# EAGLE board driver_piezo2_pan (EAGLE 7.1.0)
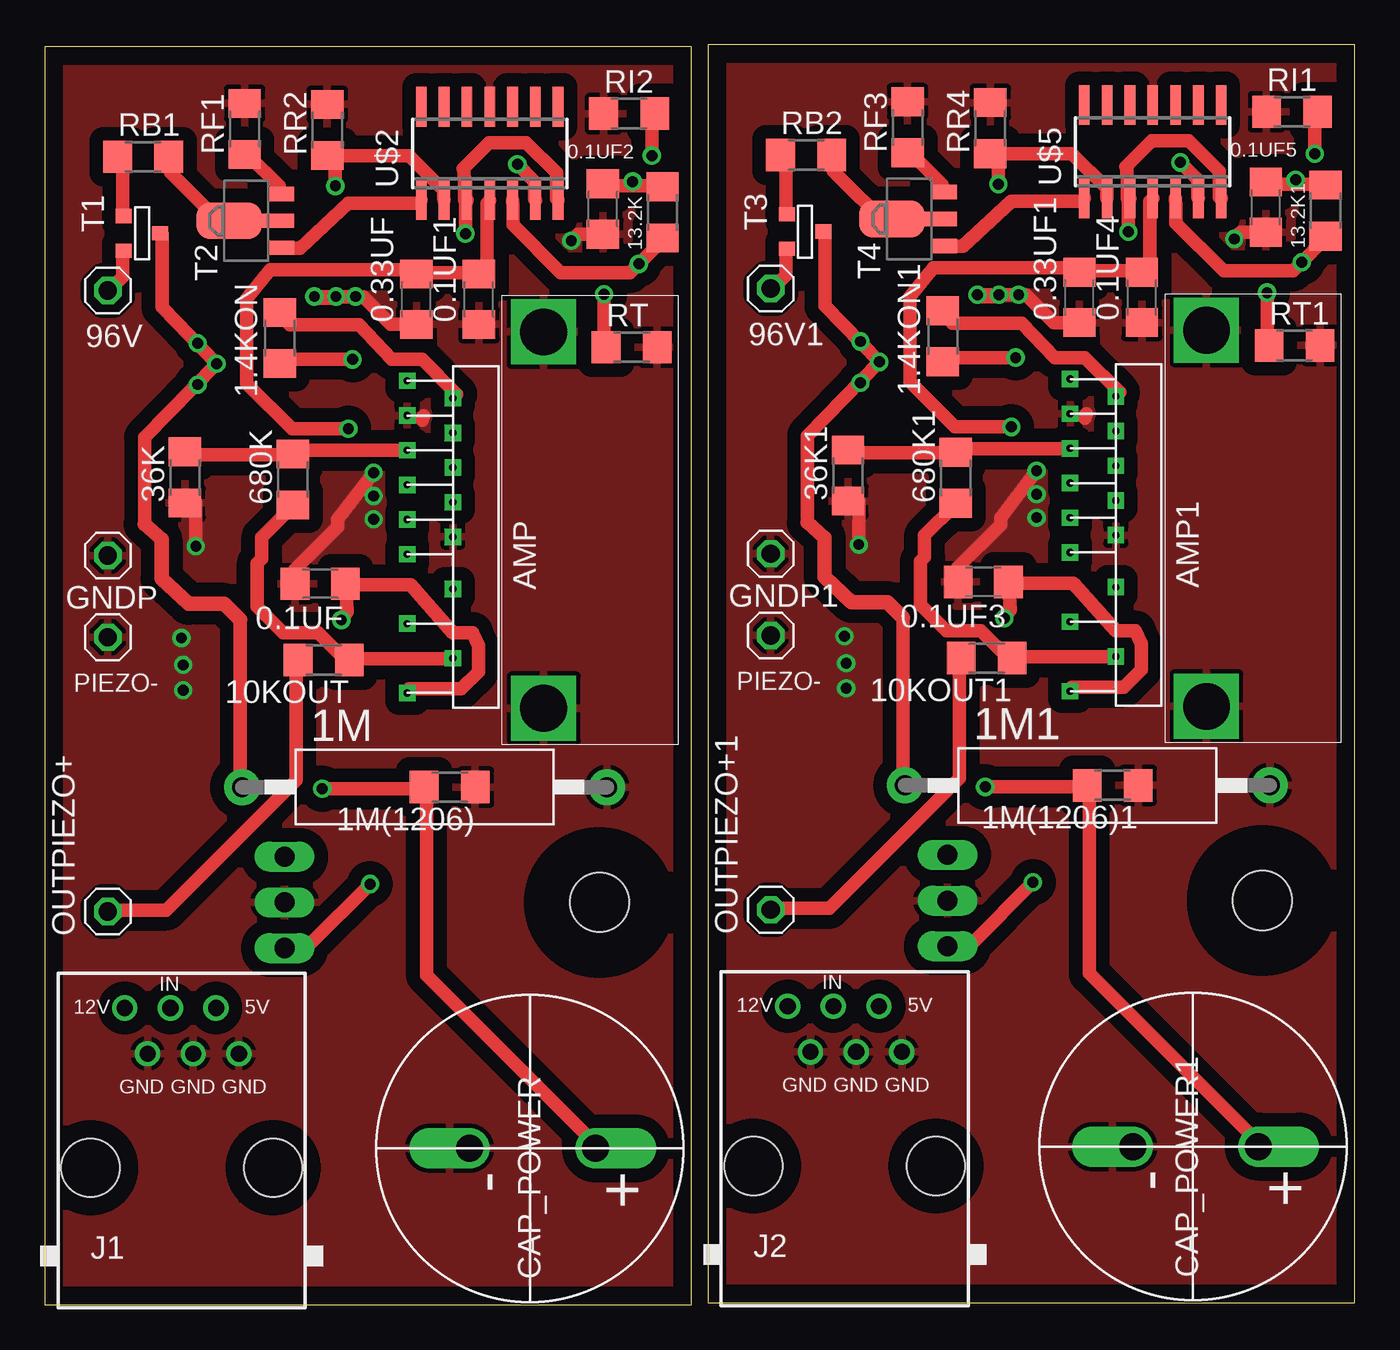
[diagram p0: board, top side]
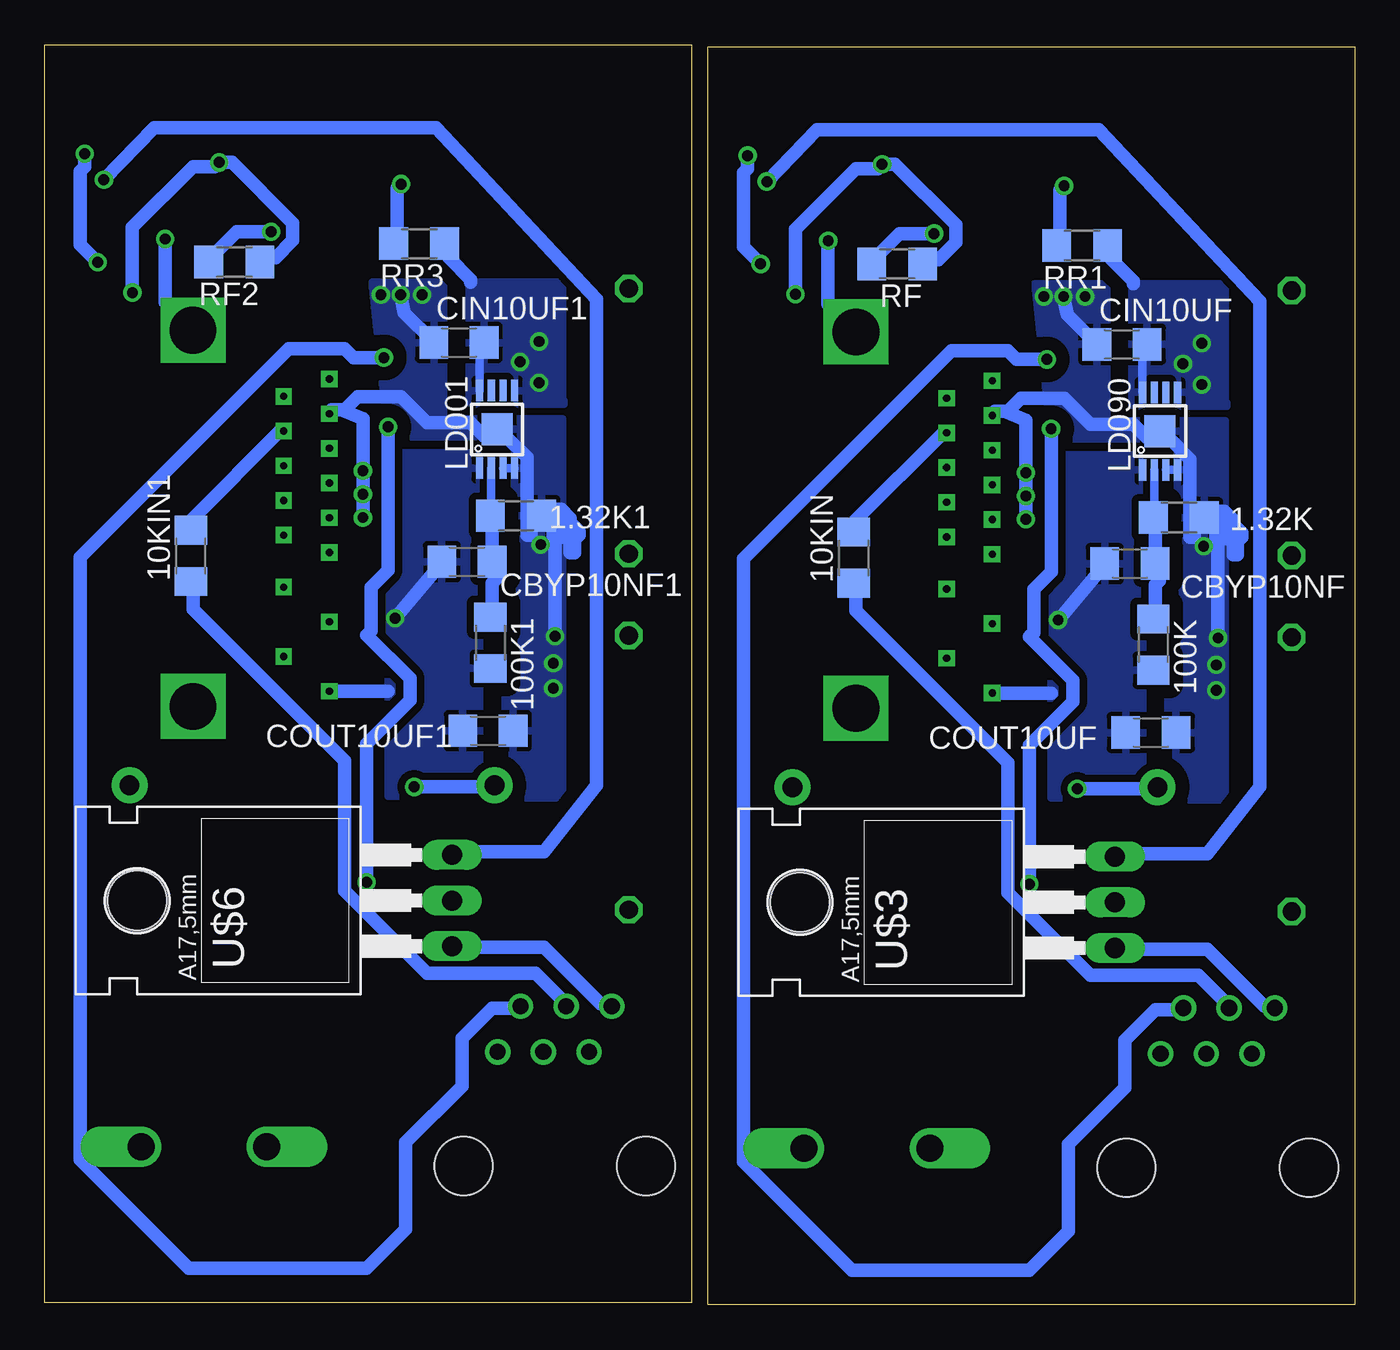
[diagram p1: board, bottom side, seen from below]

Size 72.9 x 70.1 mm. Coordinates in mm from the lower left corner, seen from the top.
Outline: 0,0 36,0 36,70 0,70 0,0
Outline: 36.9,0.1 72.9,0.1 72.9,70.1 36.9,70.1 36.9,0.1
Copper layers (1*16): Top 0.035mm / dielectric 1.5mm / Bottom 0.035mm
Design rules "default *": minimum track width 30mil, minimum drill 24mil, track to track 8mil, track to pad 8mil, pad to pad 8mil, via to via 8mil, smd to smd 8mil, copper to edge 40mil, drill to drill 8mil, minimum pad ring 10mil, minimum via ring 8mil, stop-mask expansion 4mil, vias tented up to drill 0mil, thermal gap 10mil
Net classes: 1 PWR: width 0.127 mm, clearance 0.406 mm; 2 GND: width 0.127 mm, clearance 0.762 mm; 3 VIN: width 0.127 mm, clearance 0.406 mm; 4 5V: width 0.406 mm, clearance 0.61 mm

## Footprints (pad centres in the part's own frame; a part is rotated, then mirrored left to right if it is on the bottom)
C1206 = smd 1.6 x 1.8: 1 -1.4,0; 2 1.4,0
R1206 = smd 1.6 x 1.803: 1 -1.422,0; 2 1.422,0
CA0002 = drill 1.1 pad 2: 1 -10.16,0; 2 10.16,0
1X01 = drill 1.016 octagon: 1 0,0
POWER_AMP_LME49811TB = drill 0.4 square: -VEE -1.351,-0.455; COMP -1.351,3.405; GND -3.891,6.3; IN+ -1.351,5.335; IN- -3.891,4.37; NC -1.351,-3.35; NC1 -3.891,-1.42; NC2 -3.891,0.51; NC3 -1.351,1.475; NC4 -3.891,2.44; NC5 -3.891,8.23; SD -1.351,7.265; SINK -3.891,-5.28; SOURCE -1.351,-7.21; VCC -3.891,-9.14
CAP200V = drill 1.5 offset: + 0,3.65; - 0,-3.35
RJ12-STRAIGHT-ANALOG = drill 0.9 pad 1.4: +5V 1.905,8.89; +12V -3.175,8.89; GND1 3.175,6.35; GND2 0.635,6.35; GND3 -1.905,6.35; IN -0.635,8.89 | hole 3.251: -5.08,0; 5.08,0
S-PDSO-G08 = smd 0.4 x 1.2: 1 -0.975,-2.157; 2 -0.325,-2.157; 3 0.325,-2.157; 4 0.975,-2.157; 5 0.975,2.157; 6 0.325,2.157; 7 -0.325,2.157; 8 -0.975,2.157 | smd 1.73 x 1.78: TH 0,0
SOT-23 = smd 0.787 x 0.889: 1 0.025,-1.016; 2 -0.94,1.016; 3 0.991,1.016
SOT89 = smd 0.8 x 1.4: 1 -1.499,-1.981; 3 1.499,-1.981 | smd 0.8 x 1.9: 2 0,-1.727 | smd 2.032 x 3.65: 2@1 0,0.94
DISIPADOR = drill 2.6 square: P$1 -2.72,-9.99; P$2 -2.72,10.95
SO14 = smd 0.6 x 2.2: 1 -3.81,-2.6; 2 -2.54,-2.6; 3 -1.27,-2.6; 4 0,-2.6; 5 1.27,-2.6; 6 2.54,-2.6; 7 3.81,-2.6; 8 3.81,2.6; 9 2.54,2.6; 10 1.27,2.6; 11 0,2.6; 12 -1.27,2.6; 13 -2.54,2.6; 14 -3.81,2.6
TO220 = drill 1.118 long: 1 -2.54,-10.16; 2 0,-10.16; 3 2.54,-10.16 | hole 3.302: 0,7.366

## Placement (x,y rotation side)
0.1UF  [C1206]  15.33,40.12 180 top
0.1UF1  [C1206]  24.16,55.95 90 top
0.1UF2  [C1206]  31.06,60.97 90 top
0.1UF3  [C1206]  52.23,40.22 180 top
0.1UF4  [C1206]  61.06,56.05 90 top
0.1UF5  [C1206]  67.96,61.07 90 top
0.33UF  [C1206]  20.68,55.95 90 top
0.33UF1  [C1206]  57.58,56.05 90 top
1.4KON  [R1206]  13.08,53.79 90 top
1.4KON1  [R1206]  49.98,53.89 90 top
1.32K  [R1206]  9.78,43.8 180 bottom
1.32K1  [R1206]  46.68,43.9 180 bottom
1M  [CA0002]  21.13,28.8 0 top
1M1  [CA0002]  58.03,28.9 0 top
1M(1206)  [R1206]  22.53,28.8 180 top
1M(1206)1  [R1206]  59.43,28.9 180 top
10KIN  [R1206]  27.88,41.57 90 bottom
10KIN1  [R1206]  64.78,41.67 90 bottom
10KOUT  [R1206]  15.52,35.88 180 top
10KOUT1  [R1206]  52.42,35.98 180 top
13.2K  13.2K  [R1206]  34.38,60.78 90 top
13.2K1  13.2K  [R1206]  71.28,60.88 90 top
36K  [R1206]  7.8,46.04 90 top
36K1  [R1206]  44.7,46.14 90 top
96V  [1X01]  3.5,56.44 0 top
96V1  [1X01]  40.4,56.54 0 top
100K  [R1206]  11.2,36.73 270 bottom
100K1  [R1206]  48.1,36.83 270 bottom
680K  [R1206]  13.8,45.92 90 top
680K1  [R1206]  50.7,46.02 90 top
AMP  POWER_AMP_LME49811TB  [POWER_AMP_LME49811TB]  24.06,43.18 0 top
AMP1  POWER_AMP_LME49811TB  [POWER_AMP_LME49811TB]  60.96,43.28 0 top
CAP_POWER  CAP200VCAP200V  [CAP200V]  27,8.7 270 top
CAP_POWER1  CAP200VCAP200V  [CAP200V]  63.9,8.8 270 top
CBYP10NF  [C1206]  12.51,41.24 0 bottom
CBYP10NF1  [C1206]  49.41,41.34 0 bottom
CIN10UF  [C1206]  12.95,53.44 0 bottom
CIN10UF1  [C1206]  49.85,53.54 0 bottom
COUT10UF  [C1206]  11.34,31.84 0 bottom
COUT10UF1  [C1206]  48.24,31.94 0 bottom
GND1  [1X01]  40.4,37.24 270 top
GND2  [1X01]  3.5,37.14 270 top
GNDP  [1X01]  3.5,41.69 0 top
GNDP1  [1X01]  40.4,41.79 0 top
J1  RJ12STRAIGHT-ANALOG  [RJ12-STRAIGHT-ANALOG]  7.62,7.62 0 top
J2  RJ12STRAIGHT-ANALOG  [RJ12-STRAIGHT-ANALOG]  44.52,7.72 0 top
LD001  TPS7A4001  [S-PDSO-G08]  47.73,48.71 0 bottom
LD090  TPS7A4001  [S-PDSO-G08]  10.83,48.61 0 bottom
OUTPIEZO+  [1X01]  3.5,21.88 90 top
OUTPIEZO+1  [1X01]  40.4,21.98 90 top
RB1  100k  [R1206]  5.47,63.88 0 top
RB2  100k  [R1206]  42.37,63.98 0 top
RF  10k  [R1206]  25.46,57.92 180 bottom
RF1  10k  [R1206]  11.12,65.42 90 top
RF2  10k  [R1206]  62.36,58.02 180 bottom
RF3  10k  [R1206]  48.02,65.52 90 top
RI1  280k  [R1206]  69.42,66.38 0 top
RI2  280k  [R1206]  32.52,66.28 0 top
RR1  810k-806k  [R1206]  15.17,58.94 180 bottom
RR2  90k  [R1206]  15.72,65.37 90 top
RR3  810k-806k  [R1206]  52.07,59.04 180 bottom
RR4  90k  [R1206]  52.62,65.47 90 top
RT  10k  [R1206]  32.66,53.28 0 top
RT1  10k  [R1206]  69.56,53.38 0 top
T1  FMMT718  [SOT-23]  5.41,59.59 90 top
T2  [SOT89]  11.19,60.31 90 top
T3  FMMT718  [SOT-23]  42.31,59.69 90 top
T4  [SOT89]  48.09,60.41 90 top
U$1  DISIPADOR  [DISIPADOR]  30.48,43.18 0 top
U$2  LM324  [SO14]  24.76,64.06 0 top
U$3  7805  [TO220]  23.5,22.39 90 bottom
U$4  DISIPADOR  [DISIPADOR]  67.38,43.28 0 top
U$5  LM324  [SO14]  61.66,64.16 0 top
U$6  7805  [TO220]  60.4,22.49 90 bottom

## Library data of the parts
0.1UF 0.1UF1-0.1UF5 0.33UF 0.33UF1 CBYP10NF CBYP10NF1 CIN10UF CIN10UF1 COUT10UF COUT10UF1 = rcl
1.4KON 1.4KON1 1.32K 1.32K1 1M(1206) 1M(1206)1 10KIN 10KIN1 10KOUT 10KOUT1 13.2K 13.2K1 36K 36K1 100K 100K1 680K 680K1 RB1 RB2 RF RF1-RF3 RI1 RI2 RR1-RR4 RT RT1 = resistor
1M 1M1 = resistor-power; OC_FARNELL: unknown; OC_NEWARK: unknown
96V 96V1 GND1 GND2 GNDP GNDP1 OUTPIEZO+ OUTPIEZO+1 = pinhead
AMP AMP1 CAP_POWER CAP_POWER1 LD001 LD090 U$1-U$6 = PIEZO_LBR
J1 J2 = lpatiny
T1 T3 = zetex; MPN: FMMT718; OC_FARNELL: 9526463RL; OC_NEWARK: 96K9968
T2 T4 = zetex; MPN: DSS4540X-13; OC_FARNELL: 1710677; OC_NEWARK: 25R4564

## Nets
1OUT: T2.1 U$2.1
1OUT1: T4.1 U$5.1
2IN+: 13.2K.1 RI2.2 U$2.5
2IN+1: 13.2K1.1 RI1.2 U$5.5
2IN-: RF.1 RT.1 U$2.6
2IN-1: RF2.1 RT1.1 U$5.6
2OUT: RF.2 U$2.3 U$2.7
2OUT1: RF2.2 U$5.3 U$5.7
5V [5V]: 1.4KON.1 J1.+5V
5V1 [5V]: 1.4KON1.1 J2.+5V
5VOP: 0.1UF2.2 13.2K.2 U$3.3
5VOP1: 0.1UF5.2 13.2K1.2 U$6.3
12V: 0.1UF1.2 0.33UF.2 J1.+12V U$2.4 U$3.1
12V1: 0.1UF4.2 0.33UF1.2 J2.+12V U$5.4 U$6.1
B: 36K.2 680K.2 AMP.IN-
B1: 36K1.2 680K1.2 AMP1.IN-
FB: 1.32K.2 100K.1 CBYP10NF.2 LD090.2
FB1: 1.32K1.2 100K1.1 CBYP10NF1.2 LD001.2
GND [GND]: 0.1UF1.1 0.1UF2.1 0.1UF.2 0.33UF.1 1.32K.1 1M(1206).1 1M.2 36K.1 AMP.-VEE AMP.GND CAP_POWER.- CIN10UF.1 COUT10UF.2 GND2.1 GNDP.1 J1.GND1 J1.GND2 J1.GND3 LD090.3 LD090.4 LD090.TH RF1.2 RI2.1 RR2.2 RT.2 U$1.P$1 U$1.P$2 U$2.11 U$3.2
GND1 [GND]: 0.1UF3.2 0.1UF4.1 0.1UF5.1 0.33UF1.1 1.32K1.1 1M1.2 1M(1206)1.1 36K1.1 AMP1.-VEE AMP1.GND CAP_POWER1.- CIN10UF1.1 COUT10UF1.2 GND1.1 GNDP1.1 J2.GND1 J2.GND2 J2.GND3 LD001.3 LD001.4 LD001.TH RF3.2 RI1.1 RR4.2 RT1.2 U$4.P$1 U$4.P$2 U$5.11 U$6.2
IN_AMP: 10KIN.2 AMP.IN+
IN_AMP1: 10KIN1.2 AMP1.IN+
IN_VOLTAGE: 10KIN.1 J1.IN
IN_VOLTAGE1: 10KIN1.1 J2.IN
N$1: RB2.2 T4.2 T4.2@1
N$2: RB2.1 T3.3
N$3: RB1.2 T2.2 T2.2@1
N$4: RB1.1 T1.3
N$5: RF1.1 T2.3
N$6: RF3.1 T4.3
ON: 1.4KON.2 AMP.SD
ON1: 1.4KON1.2 AMP1.SD
OUT_PIEZO: 10KOUT.2 OUTPIEZO+.1
OUT_PIEZO1: 10KOUT1.2 OUTPIEZO+1.1
SOURCE: 10KOUT.1 680K.1 AMP.SOURCE
SOURCE1: 10KOUT1.1 680K1.1 AMP1.SOURCE
V1 [PWR]: 0.1UF3.1 100K1.2 AMP1.VCC CBYP10NF1.1 COUT10UF1.1 LD001.1
V90 [PWR]: 0.1UF.1 100K.2 AMP.VCC CBYP10NF.1 COUT10UF.1 LD090.1
VF: RR1.2 RR2.1 U$2.2
VF1: RR3.2 RR4.1 U$5.2
VIN [VIN]: 1M(1206).2 1M.1 CAP_POWER.+ CIN10UF.2 LD090.5 LD090.8 RR1.1 T1.1
VIN1 [VIN]: 1M1.1 1M(1206)1.2 CAP_POWER1.+ CIN10UF1.2 LD001.5 LD001.8 RR3.1 T3.1
VINS: 96V.1 T1.2
VINS1: 96V1.1 T3.2

## Tracks (layer width: path | path; a pad name or v marks a point on that pad's centre or on a via)
1OUT
  Top 0.762: U$2.1 20.75,61.29 16.89,61.29 14.2,58.8 13.17,58.8 T2.1
1OUT1
  Top 0.762: U$5.1 57.65,61.39 53.79,61.39 51.09,58.9 50.07,58.9 T4.1
2IN+  (via drill 0.61)
  Top 0.762: 13.2K.1 34.27,59.12 v33.06,57.91 32.58,57.43 28.71,57.43 26.06,60.08 26.06,61.05 U$2.5 | v33.78,63.94 33.78,66.12 RI2.2
  Bottom 0.762: v33.78,63.94 33.78,63.22 34.02,62.98 34.02,58.88 v33.06,57.91
2IN+1  (via drill 0.61)
  Top 0.762: 13.2K1.1 71.17,59.22 v69.96,58.01 69.47,57.53 65.61,57.53 62.96,60.18 62.96,61.15 U$5.5 | v70.68,64.04 70.68,66.22 RI1.2
  Bottom 0.762: v70.68,64.04 70.68,63.32 70.92,63.08 70.92,58.98 v69.96,58.01
2IN-  (via drill 0.61)
  Top 0.762: v26.3,63.46 27.27,62.5 27.27,61.53 U$2.6 | v31.13,56.22 31.13,53.33 RT.1
  Bottom 0.762: RF.1 23.89,58.15 23.16,58.15 22.2,59.12 22.2,60.08 25.58,63.46 v26.3,63.46 26.54,63.22 27.75,63.22 31.13,59.84 v31.13,56.22
2IN-1  (via drill 0.61)
  Top 0.762: v63.2,63.56 64.17,62.6 64.17,61.63 U$5.6 | v68.03,56.32 68.03,53.43 RT1.1
  Bottom 0.762: RF2.1 60.79,58.25 60.06,58.25 59.1,59.22 59.1,60.18 62.48,63.56 v63.2,63.56 63.44,63.32 64.65,63.32 68.03,59.94 v68.03,56.32
2OUT  (via drill 0.61)
  Top 0.762: v23.41,59.6 23.41,61.29 U$2.3 23.35,61.47 23.35,62.44 23.33,63.12 23.27,63.22 24.72,64.67 26.78,64.67 28.47,62.98 28.47,61.53 U$2.7
  Bottom 0.762: v23.41,59.6 25.34,59.6 26.78,58.15 RF.2
2OUT1  (via drill 0.61)
  Top 0.762: v60.31,59.7 60.31,61.39 U$5.3 60.25,61.57 60.25,62.54 60.23,63.22 60.17,63.32 61.62,64.77 63.68,64.77 65.37,63.08 65.37,61.63 U$5.7
  Bottom 0.762: v60.31,59.7 62.24,59.7 63.68,58.25 RF2.2
5V  (via drill 0.61)
  Top 0.762: v17.13,52.6 13.51,52.6 1.4KON.1
  Bottom 0.762: v17.13,52.6 18.82,52.6 19.3,53.09 22.44,53.09 34.02,41.5 34.02,7.96 27.99,1.93 18.1,1.93 15.93,4.1 15.93,8.93 12.79,12.06 12.79,14.72 11.1,16.41 9.65,16.41 J1.+5V
5V1  (via drill 0.61)
  Top 0.762: v54.03,52.7 50.41,52.7 1.4KON1.1
  Bottom 0.762: v54.03,52.7 55.72,52.7 56.2,53.19 59.34,53.19 70.92,41.6 70.92,8.06 64.89,2.03 55,2.03 52.83,4.2 52.83,9.03 49.69,12.16 49.69,14.82 48,16.51 46.55,16.51 J2.+5V
5VOP  (via drill 0.61)
  Top 0.762: 32.52,62.26 34.27,62.26 13.2K.2 | 32.52,62.26 31.37,62.26 0.1UF2.2 | v32.72,62.5 32.52,62.26
  Bottom 0.762: v32.72,62.5 29.92,65.39 14.24,65.39 5.29,55.84 5.29,28.82 8.2,25.09 13.03,25.09 U$3.3
5VOP1  (via drill 0.61)
  Top 0.762: 69.42,62.35 71.17,62.35 13.2K1.2 | 69.42,62.35 68.27,62.35 0.1UF5.2 | v69.62,62.6 69.42,62.35
  Bottom 0.762: v69.62,62.6 66.82,65.49 51.14,65.49 42.19,55.94 42.19,28.91 45.1,25.2 49.93,25.2 U$6.3
12V  (via drill 0.61)
  Top 0.762: U$2.4 24.61,61.29 24.61,57.67 24.37,57.43 0.1UF1.2 23.89,57.43 20.75,57.43 0.33UF.2 20.61,57.59 12.55,57.59 11.24,55.98 11.24,51.26 13.75,48.74 v16.89,48.74 | v18.1,23.41 14.72,20.03 13.51,20.03 U$3.1
  Bottom 0.762: J1.+12V 4.58,16.65 5.07,16.65 8.2,19.79 13.03,19.79 U$3.1 | v18.1,23.41 18.1,31.13 15.68,33.54 15.68,34.75 18.1,37.16 17.86,37.4 17.86,39.81 16.89,40.78 v16.89,48.74
12V1  (via drill 0.61)
  Top 0.762: U$5.4 61.51,61.39 61.51,57.77 61.27,57.53 0.1UF4.2 60.79,57.53 57.65,57.53 0.33UF1.2 57.51,57.69 49.45,57.69 48.14,56.08 48.14,51.36 50.65,48.84 v53.79,48.84 | v55,23.51 51.62,20.13 50.41,20.13 U$6.1
  Bottom 0.762: J2.+12V 41.48,16.75 41.97,16.75 45.1,19.89 49.93,19.89 U$6.1 | v55,23.51 55,31.23 52.58,33.64 52.58,34.85 55,37.26 54.76,37.5 54.76,39.91 53.79,40.88 v53.79,48.84
B
  Top 0.762: 36K.2 7.96,47.3 13.75,47.3 680K.2 13.99,47.54 20.03,47.54 AMP.IN-
B1
  Top 0.762: 36K1.2 44.86,47.4 50.65,47.4 680K1.2 50.9,47.64 56.93,47.64 AMP1.IN-
FB
  Bottom 0.46: LD090.2 11.15,43.85 1.32K.2
  Bottom 0.762: 1.32K.2 11.1,43.67 11.1,41.26 CBYP10NF.2 10.86,41.02 10.86,40.3 11.1,40.06 11.1,38.37 100K.1
FB1
  Bottom 0.46: LD001.2 48.05,43.95 1.32K1.2
  Bottom 0.762: 1.32K1.2 48,43.77 48,41.36 CBYP10NF1.2 47.76,41.12 47.76,40.4 48,40.16 48,38.47 100K1.1
GND  (via drill 0.6)
  Top 0.46: 7.6,37.14 v7.6,37.1
  Top 0.762: 36K.1 8.4,44.62 v8.4,42.2 | 0.33UF.1 19.25,54.55 17.7,56.1 v17.3,56.1 16.1,56.1 | 0.1UF2.1 29.67,59.57 v29.3,59.2 | 20.99,49.23 21.08,49.48 | 0.1UF.2 13.93,40.93 16.3,43.3 16.3,43.7 v18.3,46.3 | 16.1,56.1 v15,56.1 15,56 16.1,56 16.1,56.1
  Bottom 0.46: LD090.3 LD090.4
  Bottom 0.762: 6.27,42.71 6.76,42.23 6.76,41.74 6.51,41.74 6.51,42.23 7,42.71 7,43.19 7.24,43.19 7.24,42.95 7.48,42.95 7.48,43.19 7.24,43.43 7.24,43.67 7.72,43.67 7.72,42.71 7.24,42.71 7.2,42.61 | 6.27,42.71 6.27,42.95 6.76,43.43 6.76,43.67 7.24,44.16 8.45,44.16 8.93,43.67 8.93,42.71 9.17,42.71 9.17,47.05 10.38,48.26 11.58,48.26 12.31,48.98 14.72,48.98 16.17,50.43 18.58,50.43 19.3,49.71 19.5,49.71 | 19.5,49.71 20.03,49.71 AMP.GND | 6.27,42.71 7.6,42.71 v7.6,37.1 | v16.2,56.1 16,55.1 14.4,53.5 | v29.3,59.2 29.3,55.67 U$1.P$2 | 19.5,49.71 18.3,49.21 v18.3,46.3 v18.3,45 v18.3,43.7
  other vias: 7.7,35.6 7.7,34.2
  pour Bottom: 10.4,48.2 10.4,28.1 7.2,28.1 7.2,49.2 13.8,49.2 13.8,56.8 17.8,56.8 16.9,48.2
  pour Top: 0,70 36,70 36,0 0,0
GND1  (via drill 0.6)
  Top 0.46: 44.5,37.24 v44.5,37.2
  Top 0.762: 36K1.1 45.3,44.72 v45.3,42.3 | 0.33UF1.1 56.15,54.65 54.6,56.2 v54.2,56.2 53,56.2 | 0.1UF5.1 66.57,59.67 v66.2,59.3 | 57.89,49.33 57.98,49.58 | 0.1UF3.2 50.83,41.03 53.2,43.4 53.2,43.8 v55.2,46.4 | 53,56.2 v51.9,56.2 51.9,56.1 53,56.1 53,56.2
  Bottom 0.46: LD001.3 LD001.4
  Bottom 0.762: 43.17,42.81 43.66,42.33 43.66,41.84 43.41,41.84 43.41,42.33 43.9,42.81 43.9,43.29 44.14,43.29 44.14,43.05 44.38,43.05 44.38,43.29 44.14,43.53 44.14,43.77 44.62,43.77 44.62,42.81 44.14,42.81 44.1,42.71 | 43.17,42.81 43.17,43.05 43.66,43.53 43.66,43.77 44.14,44.26 45.35,44.26 45.83,43.77 45.83,42.81 46.07,42.81 46.07,47.15 47.28,48.36 48.48,48.36 49.21,49.08 51.62,49.08 53.07,50.53 55.48,50.53 56.2,49.81 56.4,49.81 | 56.4,49.81 56.93,49.81 AMP1.GND | 43.17,42.81 44.5,42.81 v44.5,37.2 | v53.1,56.2 52.9,55.2 51.3,53.6 | v66.2,59.3 66.2,55.77 U$4.P$2 | 56.4,49.81 55.2,49.31 v55.2,46.4 v55.2,45.1 v55.2,43.8
  other vias: 44.6,35.7 44.6,34.3
  pour Bottom: 47.3,48.3 47.3,28.2 44.1,28.2 44.1,49.3 50.7,49.3 50.7,56.9 54.7,56.9 53.8,48.3
  pour Top: 36.9,70.1 72.9,70.1 72.9,0.1 36.9,0.1
IN_AMP
  Bottom 0.762: 10KIN.2 27.75,43.19 27.75,43.67 22.92,48.5 AMP.IN+
IN_AMP1
  Bottom 0.762: 10KIN1.2 64.65,43.29 64.65,43.77 59.82,48.6 AMP1.IN+
IN_VOLTAGE
  Bottom 0.762: 10KIN.1 27.75,40.06 27.75,38.61 19.3,30.16 19.3,22.92 14.72,18.34 8.69,18.34 7,16.65 J1.IN
IN_VOLTAGE1
  Bottom 0.762: 10KIN1.1 64.65,40.16 64.65,38.71 56.2,30.26 56.2,23.02 51.62,18.44 45.59,18.44 43.9,16.75 J2.IN
N$1
  Top 0.762: RB2.2 43.9,63.8 43.9,63.08 47.03,59.94 T4.2@1 47.62,60.4 49.79,60.4 T4.2
N$2
  Top 0.762: T3.3 41.24,60.91 41.24,63.56 41,63.8 RB2.1
N$3
  Top 0.762: RB1.2 7,63.7 7,62.98 10.13,59.84 T2.2@1 10.72,60.3 12.89,60.3 T2.2
N$4
  Top 0.762: T1.3 4.34,60.81 4.34,63.46 4.1,63.7 RB1.1
N$5
  Top 0.762: T2.3 13.03,61.99 13.03,62.26 11.34,63.94 RF1.1
N$6
  Top 0.762: T4.3 49.93,62.09 49.93,62.35 48.24,64.04 RF3.1
ON
  Top 0.762: 1.4KON.2 13.61,54.52 17.49,54.52 19.3,52.6 20.99,52.6 22.92,50.67 AMP.SD
ON1
  Top 0.762: 1.4KON1.2 50.51,54.62 54.39,54.62 56.2,52.7 57.89,52.7 59.82,50.77 AMP1.SD
OUT_PIEZO
  Top 0.762: 10KOUT.2 13.99,35.71 13.99,29.2 6.76,21.96 3.62,21.96 OUTPIEZO+.1
OUT_PIEZO1
  Top 0.762: 10KOUT1.2 50.9,35.81 50.9,29.3 43.66,22.06 40.52,22.06 OUTPIEZO+1.1
SOURCE
  Top 0.762: 680K.1 13.75,44.4 12.06,42.71 12.06,41.5 11.82,41.26 11.82,38.85 13.27,37.4 15.2,37.4 16.72,35.88 10KOUT.1 17.13,35.95 22.68,35.95 AMP.SOURCE
SOURCE1
  Top 0.762: 680K1.1 50.65,44.5 48.97,42.81 48.97,41.6 48.72,41.36 48.72,38.95 50.17,37.5 52.1,37.5 53.62,35.98 10KOUT1.1 54.03,36.05 59.58,36.05 AMP1.SOURCE
V1  (via drill 0.6)
  Top 0.762: AMP1.VCC 57.17,34.37 60.06,34.37 61.03,35.33 61.03,36.78 60.71,37.5 60.22,37.5 59.82,37.5 59.6,37.5 57.24,40.16 53.79,40.16 0.1UF3.1 53.73,38.67 v53.4,38.2
  Bottom 0.762: 53.79,34.12 56.93,34.12 AMP1.VCC | CBYP10NF1.1 50.84,41.24 v53.4,38.2
  pour Bottom: 48.7,47.4 48.7,28.3 53.8,28.3 53.8,47.4
V90  (via drill 0.6)
  Top 0.762: AMP.VCC 20.27,34.27 23.16,34.27 24.13,35.23 24.13,36.68 23.81,37.4 23.32,37.4 22.92,37.4 22.7,37.4 20.34,40.06 16.89,40.06 0.1UF.1 16.83,38.57 v16.5,38.1
  Bottom 0.762: 16.89,34.02 20.03,34.02 AMP.VCC | CBYP10NF.1 13.94,41.14 v16.5,38.1
  pour Bottom: 11.8,47.3 11.8,28.2 16.9,28.2 16.9,47.3
VF  (via drill 0.61)
  Top 0.762: U$2.2 22.2,61.53 22.2,62.01 20.27,63.94 15.93,63.94 RR2.1 16.17,63.7 v16.17,62.26
  Bottom 0.762: v16.17,62.26 16.41,62.01 16.41,59.12 RR1.2
VF1  (via drill 0.61)
  Top 0.762: U$5.2 59.1,61.63 59.1,62.11 57.17,64.04 52.83,64.04 RR4.1 53.07,63.8 v53.07,62.35
  Bottom 0.762: v53.07,62.35 53.31,62.11 53.31,59.22 RR3.2
VIN  (via drill 0.6, 0.61)
  Top 0.762: T1.1 6.51,59.6 6.51,55.5 v9.55,52.36 5.55,48.26 5.55,43.43 | 10.86,38.12 10.86,28.96 1M.1 | CAP_POWER.+ 30.64,8.93 21.23,18.34 21.23,28.71 1M(1206).2 20.75,28.71 v15.44,28.71
  Top 0.813: 10.86,38.12 9.98,39 8,39 6.5,40.4 6.5,42.58 5.55,43.43
  Bottom 0.46: LD090.8 11.8,53.19 CIN10UF.2
  Bottom 0.762: RR1.1 13.51,58.88 13.51,58.15 12.31,56.95 12.31,56.8 | v15.44,28.71 11.1,28.71 1M.1
  other vias: 8.5,53.5 8.5,51.2
  pour Bottom: 12,50 12.4,50 12.4,56.8 7.2,56.8 7.2,50.2 7.1,50.2 7.1,50
VIN1  (via drill 0.6, 0.61)
  Top 0.762: T3.1 43.41,59.7 43.41,55.6 v46.45,52.46 42.45,48.36 42.45,43.53 | 47.76,38.23 47.76,29.06 1M1.1 | CAP_POWER1.+ 67.55,9.03 58.13,18.44 58.13,28.82 1M(1206)1.2 57.65,28.82 v52.34,28.82
  Top 0.813: 47.76,38.23 46.88,39.1 44.9,39.1 43.4,40.5 43.4,42.68 42.45,43.53
  Bottom 0.46: LD001.8 48.7,53.28 CIN10UF1.2
  Bottom 0.762: RR3.1 50.41,58.98 50.41,58.25 49.21,57.05 49.21,56.9 | v52.34,28.82 48,28.82 1M1.1
  other vias: 45.4,53.6 45.4,51.3
  pour Bottom: 48.9,50.1 49.3,50.1 49.3,56.9 44.1,56.9 44.1,50.3 44,50.3 44,50.1
VINS
  Top 0.762: T1.2 4.34,58.64 4.34,57.19 3.62,56.46 96V.1
VINS1
  Top 0.762: T3.2 41.24,58.74 41.24,57.29 40.52,56.56 96V1.1

## Text on the board
tNames: PIEZO- | PIEZO-